# EAGLE board diy_mainboard (EAGLE 6.6.0)
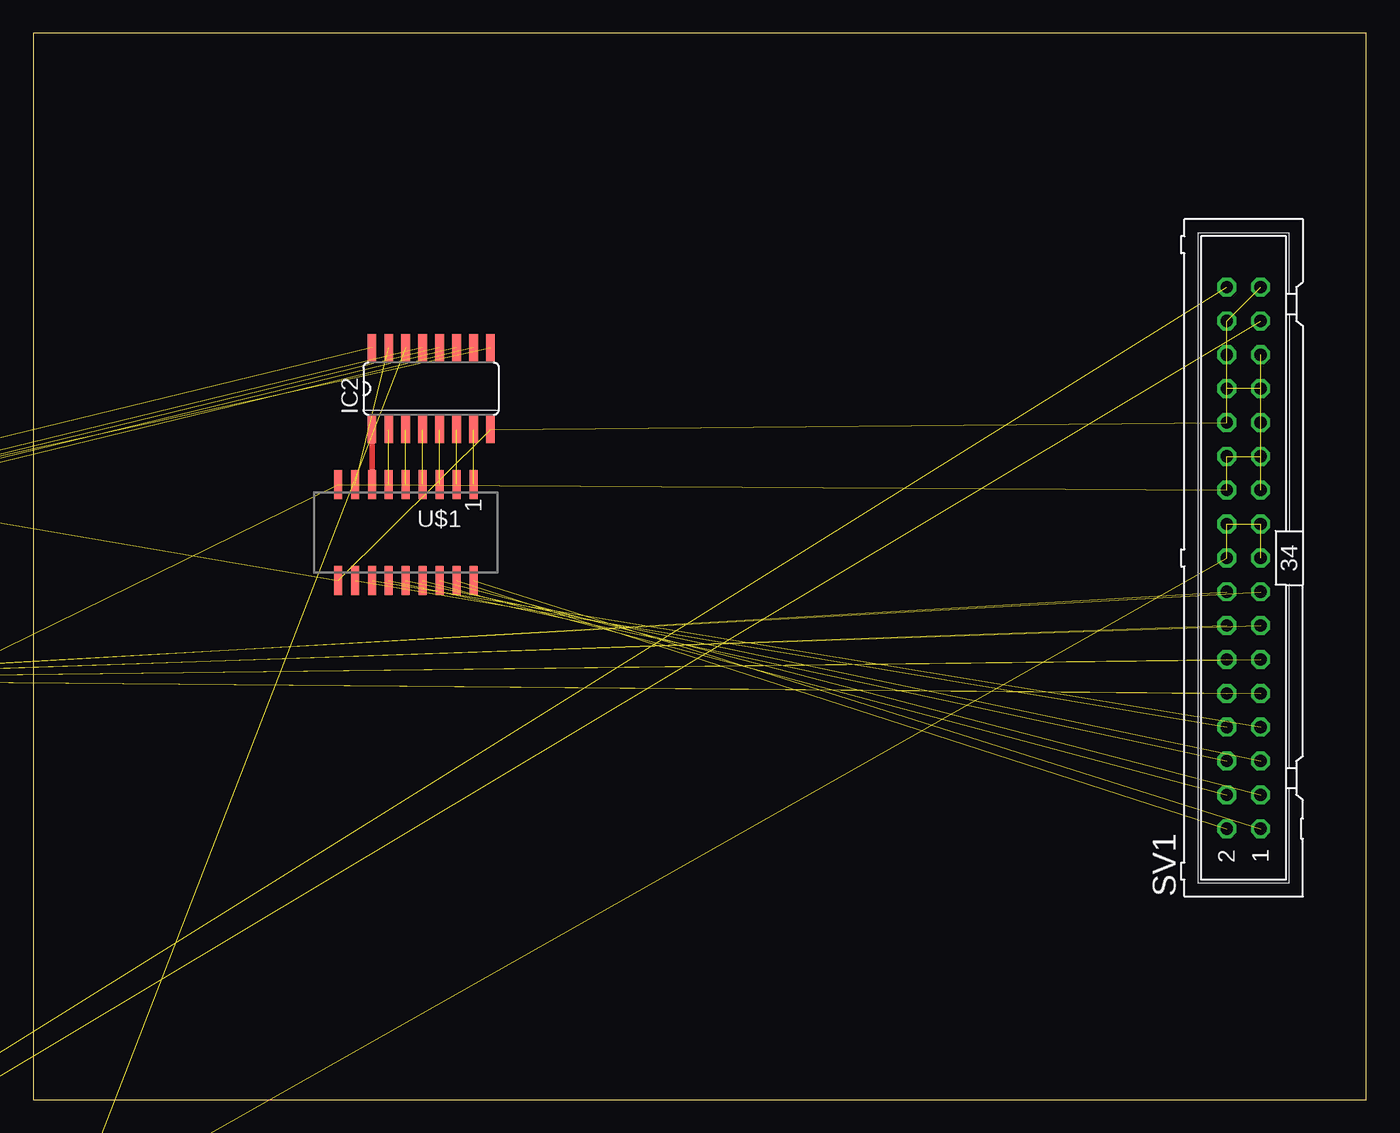
[diagram p0: board, top side]

Size 100 x 80 mm. Coordinates in mm from the lower left corner, seen from the top.
Outline: 0,0 100,0 100,80 0,80 0,0
Copper layers (1*16): Top 0.035mm / dielectric 1.5mm / Bottom 0.035mm
Design rules "default": minimum track width 10mil, minimum drill 24mil, track to track 8mil, track to pad 8mil, pad to pad 8mil, via to via 8mil, smd to smd 8mil, copper to edge 40mil, drill to drill 8mil, minimum pad ring 10mil, minimum via ring 8mil, stop-mask expansion 4mil, vias tented up to drill 0mil, thermal gap 10mil

## Footprints (pad centres in the part's own frame; a part is rotated, then mirrored left to right if it is on the bottom)
153CLV-0605 = smd 3.5 x 1.6: + 2.7,0; - -2.7,0
C0603 = smd 1.1 x 1: 1 -0.85,0; 2 0.85,0
SOD80C = smd 1.4 x 1.8: A 1.7,0; C -1.7,0
TO252 = smd 1 x 1.6: 1 -2.28,-4.8; 2 2.28,-4.8 | smd 5.4 x 6.2: 3 0,2.5
SO16 = smd 0.66 x 2.032: 1 -4.445,-3.073; 2 -3.175,-3.073; 3 -1.905,-3.073; 4 -0.635,-3.073; 5 0.635,-3.073; 6 1.905,-3.073; 7 3.175,-3.073; 8 4.445,-3.073; 9 4.445,3.073; 10 3.175,3.073; 11 1.905,3.073; 12 0.635,3.073; 13 -0.635,3.073; 14 -1.905,3.073; 15 -3.175,3.073; 16 -4.445,3.073
1X07SMD = smd 1.016 x 3.302: 1 -1.27,1.27; 2 1.27,-1.27; 3 3.81,1.27; 4 6.35,-1.27; 5 8.89,1.27; 6 11.43,-1.27; 7 13.97,1.27
1X05SMD = smd 1.016 x 3.302: 1 -1.27,1.27; 2 1.27,-1.27; 3 3.81,1.27; 4 6.35,-1.27; 5 8.89,1.27
R0805 = smd 1.3 x 1.5: 1 -0.95,0; 2 0.95,0
RN-9 = drill 0.813 long: 1 -10.16,0; 2 -7.62,0; 3 -5.08,0; 4 -2.54,0; 5 0,0; 6 2.54,0; 7 5.08,0; 8 7.62,0; 9 10.16,0
ML34 = drill 0.914 octagon: 1 -20.32,-1.27; 2 -20.32,1.27; 3 -17.78,-1.27; 4 -17.78,1.27; 5 -15.24,-1.27; 6 -15.24,1.27; 7 -12.7,-1.27; 8 -12.7,1.27; 9 -10.16,-1.27; 10 -10.16,1.27; 11 -7.62,-1.27; 12 -7.62,1.27; 13 -5.08,-1.27; 14 -5.08,1.27; 15 -2.54,-1.27; 16 -2.54,1.27; 17 0,-1.27; 18 0,1.27; 19 2.54,-1.27; 20 2.54,1.27; 21 5.08,-1.27; 22 5.08,1.27; 23 7.62,-1.27; 24 7.62,1.27; 25 10.16,-1.27; 26 10.16,1.27; 27 12.7,-1.27; 28 12.7,1.27; 29 15.24,-1.27; 30 15.24,1.27; 31 17.78,-1.27; 32 17.78,1.27; 33 20.32,-1.27; 34 20.32,1.27
TO220BV = drill 1.016 long: 1 -2.54,-2.54; 2 0,-2.54; 3 2.54,-2.54
TBD62783AFG = smd 0.6 x 2.2: 1 -5.08,-3.6; 2 -3.81,-3.6; 3 -2.54,-3.6; 4 -1.27,-3.6; 5 0,-3.6; 6 1.27,-3.6; 7 2.54,-3.6; 8 3.81,-3.6; 9 5.08,-3.6; 10 5.08,3.6; 11 3.81,3.6; 12 2.54,3.6; 13 1.27,3.6; 14 0,3.6; 15 -1.27,3.6; 16 -2.54,3.6; 17 -3.81,3.6; 18 -5.08,3.6
W237-102 = drill 1.194 long: 1 -2.5,-1.27; 2 2.5,-1.27

## Placement (x,y rotation side)
C1  100µF  [153CLV-0605]  -40.64,6.35 0 top  (outside the outline)
C2  100nF  [C0603]  -45.72,35.56 0 top  (outside the outline)
C3  100µF  [153CLV-0605]  -17.78,17.78 0 top  (outside the outline)
C4  100nF  [C0603]  -17.78,45.72 0 top  (outside the outline)
C5  100nF  [C0603]  -25.4,45.72 0 top  (outside the outline)
C6  100nF  [C0603]  -33.02,45.72 0 top  (outside the outline)
C7  100nF  [C0603]  -45.72,-80.01 0 top  (outside the outline)
D1  LL4148  [SOD80C]  -44.45,-54.61 0 top  (outside the outline)
IC1  7805DT  [TO252]  -19.05,6.35 0 top  (outside the outline)
IC2  74HC595D  [SO16]  29.84,53.34 0 top
IC3  74HC595D  [SO16]  -33.02,38.1 0 top  (outside the outline)
IC4  74HC595D  [SO16]  -39.37,-15.24 0 top  (outside the outline)
JP1  [1X07SMD]  -43.81,-107.31 0 top  (outside the outline)
JP2  [1X05SMD]  -43.18,-93.98 0 top  (outside the outline)
R1  1k  [R0805]  -44.45,-41.91 0 top  (outside the outline)
R2  10k  [R0805]  -44.45,-48.26 0 top  (outside the outline)
R3  1k  [R0805]  -44.45,-100.33 0 top  (outside the outline)
RN1  [RN-9]  -35.56,-74.93 0 top  (outside the outline)
SV1  [ML34]  90.81,40.64 90 top
T1  TIP131  [TO220BV]  -40.64,-30.48 0 top  (outside the outline)
U$1  TBD62783AFGSO18  [TBD62783AFG]  27.94,42.55 180 top
U$2  TBD62783AFGSO18  [TBD62783AFG]  -26.67,27.94 0 top  (outside the outline)
U$3  ULN2803  [TBD62783AFG]  -39.37,-25.4 0 top  (outside the outline)
X1  [W237-102]  -39.37,29.21 0 top  (outside the outline)

## Library data of the parts
C1 C3 = rcl; DIGIKEY: 493-2203-1-ND
C2 C4-C7 = rcl; DIGIKEY: 478-5052-1-ND
D1 = diode; DIGIKEY: LL4148FSCT-ND
IC1 = linear; DIGIKEY: MC7805CDTGOS-ND
IC2-IC4 = 74xx-eu; DIGIKEY: 568-2263-1-ND
JP1 JP2 = pinhead
R1-R3 = rcl
RN1 = resistor-net; OC_FARNELL: unknown; OC_NEWARK: unknown
SV1 = con-harting-ml; DIGIKEY: AE11226-ND; OC_FARNELL: unknown; OC_NEWARK: unknown
T1 = transistor
U$1 U$2 = DIY
U$3 = DIY; DIGIKEY: 296-15777-1-ND
X1 = con-wago-500; MPN: 237-102; OC_FARNELL: unknown; OC_NEWARK: 70K9898

## Nets
+5V: C3.+ C4.1 C5.2 C6.2 C7.2 IC1.2 IC2.16 IC3.16 IC4.16 JP1.7
+12V: C1.+ C2.1 D1.C IC1.1 R2.1 R3.1 RN1.1 SV1.21 SV1.22 SV1.23 SV1.24 SV1.29 U$1.9 U$2.9 X1.1
CLEAR: D1.A SV1.17 SV1.18 SV1.19 SV1.20 T1.2
CLOCK: R3.2 SV1.34 U$3.17
GND: C1.- C2.2 C3.- C4.2 C5.1 C6.1 C7.1 IC1.3 IC2.8 IC3.8 IC4.8 JP1.6 SV1.25 SV1.26 SV1.27 SV1.28 SV1.32 SV1.33 T1.3 U$1.10 U$2.10 U$3.9 X1.2
N$1: IC2.15 U$1.8
N$2: IC2.1 U$1.7
N$3: IC2.2 U$1.6
N$4: IC2.3 U$1.5
N$5: IC2.4 U$1.4
N$6: IC2.5 U$1.3
N$7: IC2.6 U$1.2
N$8: IC2.7 U$1.1
N$9: IC3.15 U$2.1
N$10: IC3.1 U$2.2
N$11: IC3.2 U$2.3
N$12: IC3.3 U$2.4
N$13: IC3.4 U$2.5
N$14: IC3.5 U$2.6
N$15: IC3.6 U$2.7
N$16: IC3.7 U$2.8
N$17: IC2.9 IC3.14
N$18: IC2.11 IC3.11 IC4.11 JP1.4
N$19: IC2.10 IC3.10 IC4.10 JP1.3
N$20: IC2.12 IC3.12 IC4.12 JP1.2
N$21: IC2.13 IC3.13 IC4.13 JP1.1
N$22: IC3.9 IC4.14
N$23: IC4.15 U$3.1
N$24: IC4.1 U$3.2
N$25: IC4.2 U$3.3
N$26: IC4.3 U$3.4
N$27: IC4.4 U$3.5
N$28: IC4.5 U$3.6
N$29: IC4.6 U$3.7
N$30: IC4.7 U$3.8
N$31: R1.2 T1.1
N$32: R1.1 R2.2 U$3.18
N$33: IC2.14 JP1.5
RESET: RN1.3 SV1.31 U$3.16
SELECT1: JP2.1 RN1.4 U$3.15
SELECT2: JP2.2 RN1.5 U$3.14
SELECT3: JP2.3 RN1.6 U$3.13
SELECT4: JP2.4 RN1.7 U$3.11
SELECT5: JP2.5 RN1.8 U$3.12
Y0: SV1.1 U$1.18
Y1: SV1.2 U$1.17
Y2: SV1.3 U$1.16
Y3: SV1.4 U$1.15
Y4: SV1.5 U$1.14
Y5: SV1.6 U$1.13
Y6: SV1.7 U$1.12
Y7: SV1.8 U$1.11
Y8: SV1.9 U$2.18
Y9: SV1.10 U$2.17
Y10: SV1.11 U$2.16
Y11: SV1.12 U$2.15
Y12: SV1.13 U$2.14
Y13: SV1.14 U$2.13
Y14: SV1.15 U$2.12
Y15: SV1.16 U$2.11

## Tracks (layer width: path | path; a pad name or v marks a point on that pad's centre or on a via)
+5V  (9 unrouted)
+12V  (14 unrouted)
CLEAR  (5 unrouted)
CLOCK  (2 unrouted)
GND  (22 unrouted)
N$1  (1 unrouted)
N$2
  Top 0.406: IC2.1 U$1.7
N$3  (1 unrouted)
N$4  (1 unrouted)
N$5  (1 unrouted)
N$6  (1 unrouted)
N$7  (1 unrouted)
N$8  (1 unrouted)
N$9  (1 unrouted)
N$10  (1 unrouted)
N$11  (1 unrouted)
N$12  (1 unrouted)
N$13  (1 unrouted)
N$14  (1 unrouted)
N$15  (1 unrouted)
N$16  (1 unrouted)
N$17  (1 unrouted)
N$18  (3 unrouted)
N$19  (3 unrouted)
N$20  (3 unrouted)
N$21  (3 unrouted)
N$22  (1 unrouted)
N$23  (1 unrouted)
N$24  (1 unrouted)
N$25  (1 unrouted)
N$26  (1 unrouted)
N$27  (1 unrouted)
N$28  (1 unrouted)
N$29  (1 unrouted)
N$30  (1 unrouted)
N$31  (1 unrouted)
N$32  (2 unrouted)
N$33  (1 unrouted)
RESET  (2 unrouted)
SELECT1  (2 unrouted)
SELECT2  (2 unrouted)
SELECT3  (2 unrouted)
SELECT4  (2 unrouted)
SELECT5  (2 unrouted)
Y0  (1 unrouted)
Y1  (1 unrouted)
Y2  (1 unrouted)
Y3  (1 unrouted)
Y4  (1 unrouted)
Y5  (1 unrouted)
Y6  (1 unrouted)
Y7  (1 unrouted)
Y8  (1 unrouted)
Y9  (1 unrouted)
Y10  (1 unrouted)
Y11  (1 unrouted)
Y12  (1 unrouted)
Y13  (1 unrouted)
Y14  (1 unrouted)
Y15  (1 unrouted)